# Altium PCB MB1814.PcbDoc (part 5 of 6)
Units mm, origin at the board's own origin, x right, y up, seen from the top; angles counter-clockwise.
Board outline 70 x 82.5 mm, 4 copper layers (Top Layer, Signal Layer 1, Signal Layer 2, Bottom Layer), stack 1.614 mm thick; 207 components, 155 nets, 901 pads, 710 vias.
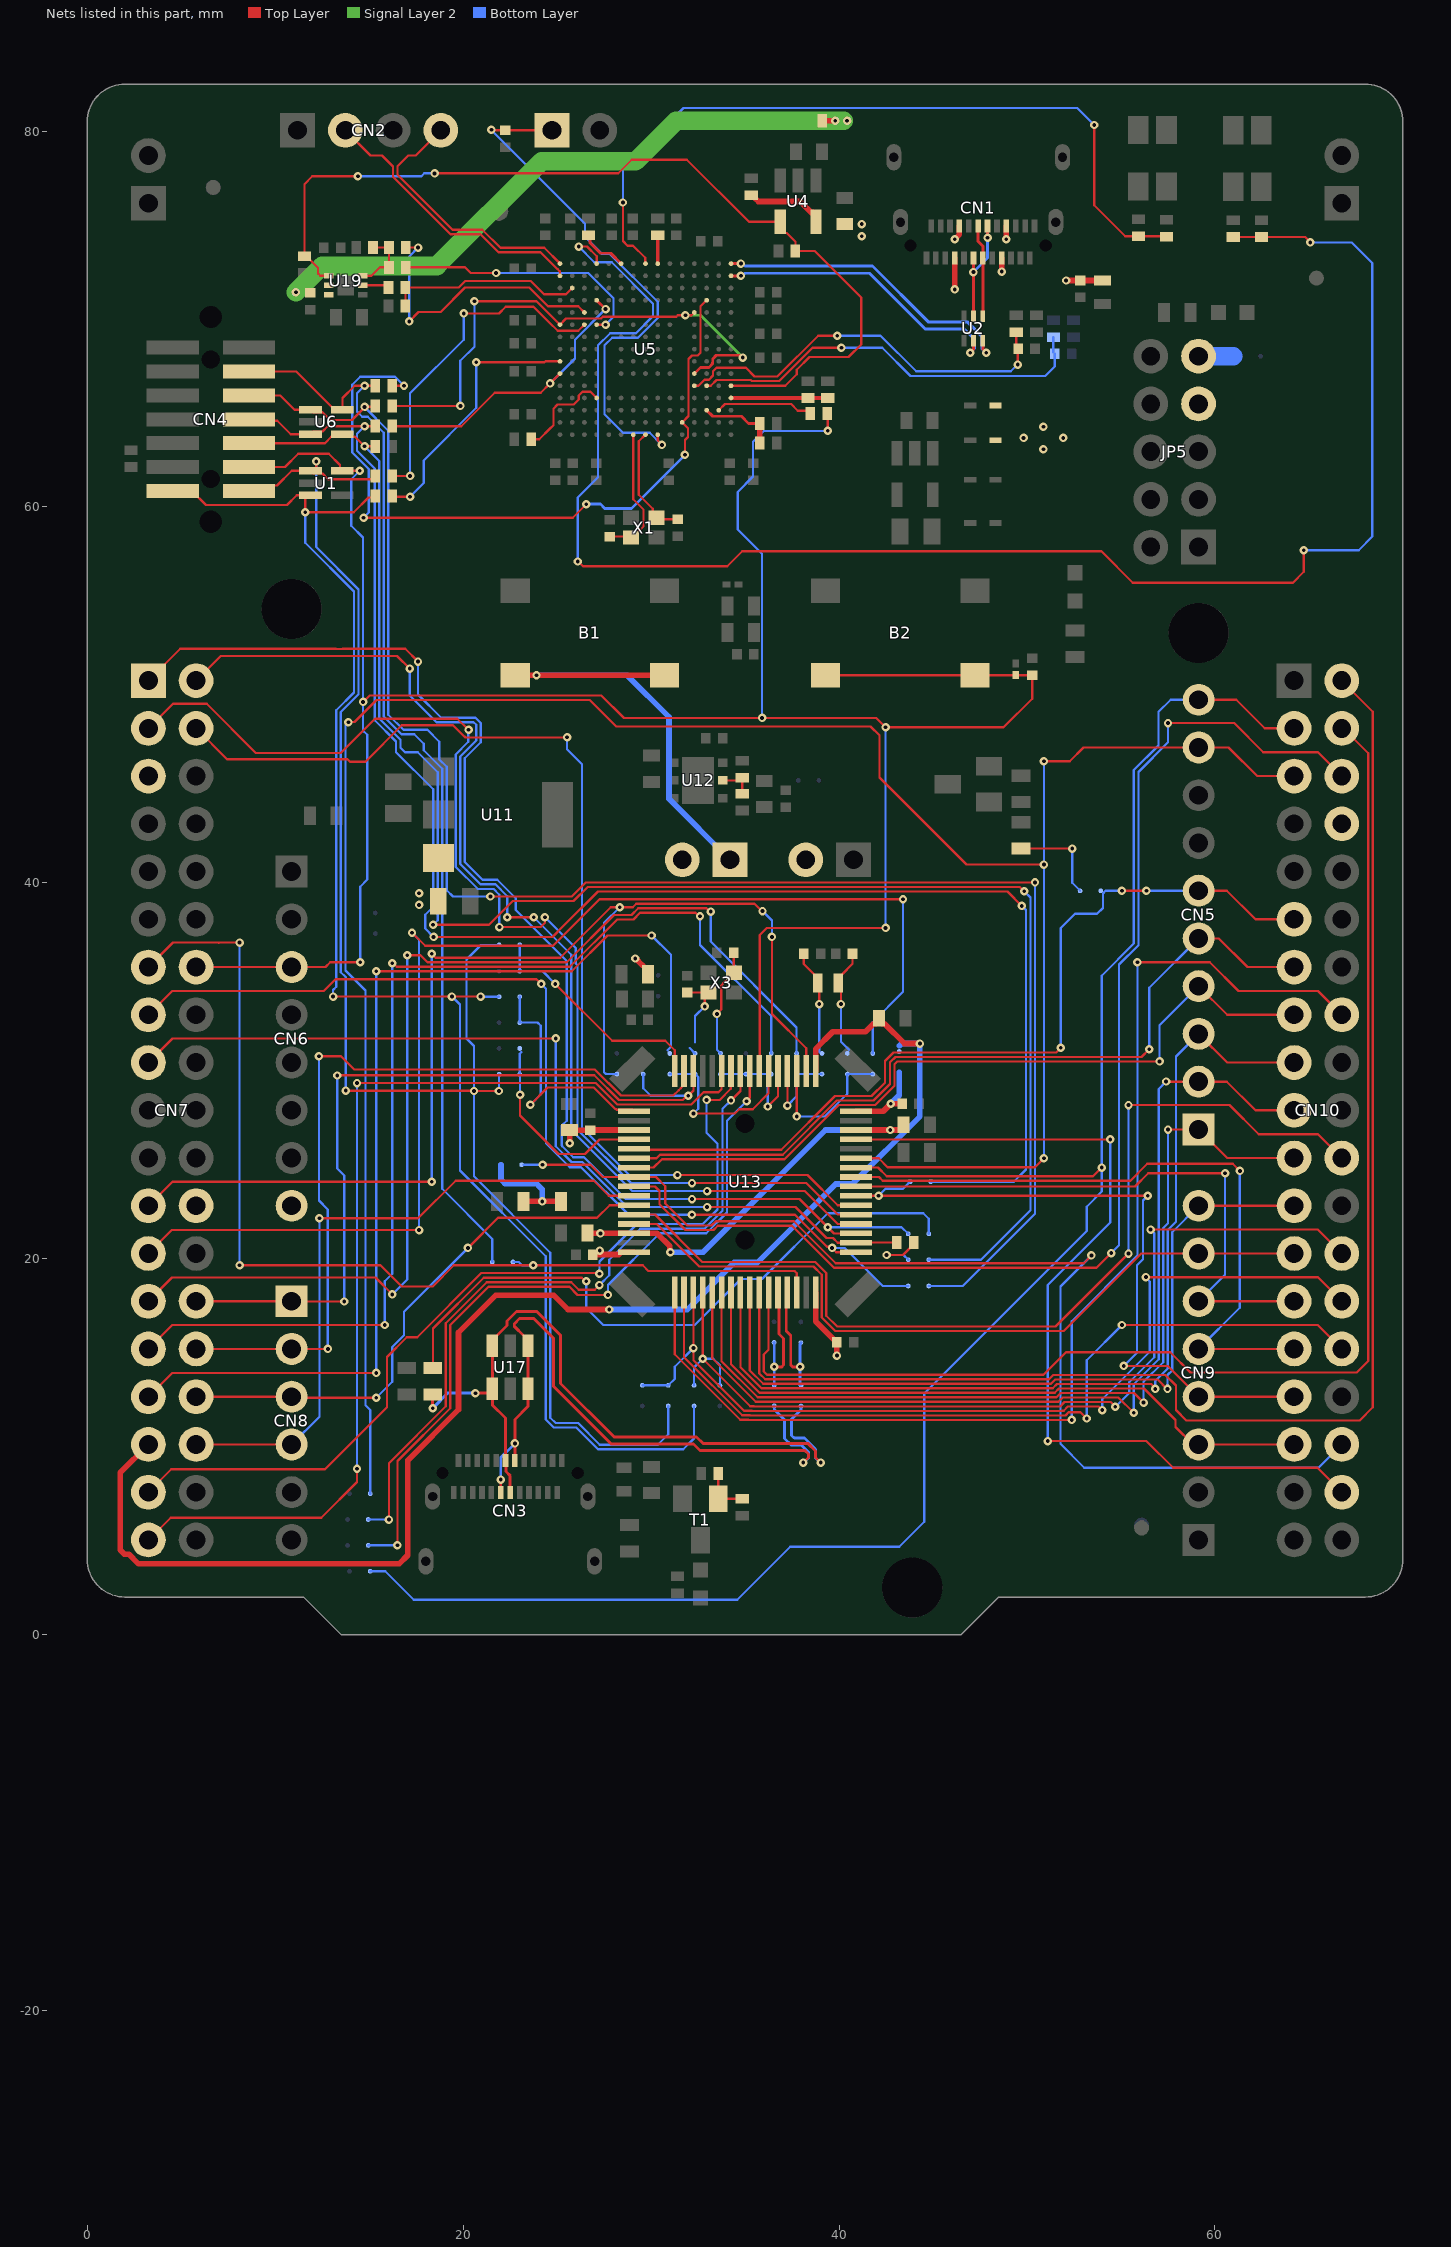
[diagram p5: the nets of this part, all layers, seen from the top]

## Via types
v1: diameter 0.45, hole 0.2, Top Layer to Bottom Layer, tented both sides, 696 vias
v2: diameter 0.45, hole 0.2, Top Layer to Bottom Layer, 14 vias

## Nets (pads, with @x,y where several pads share a name; then routed paths per layer and width w, separated by ;. In a path a pad name is that pad's centre, name@x,y a point inside that pad or via, vN(x,y) a via of type N, cw(c..) or ccw(c..) an arc to the next point about the centre after c; other vN are vias at no path point) (continued)
NetR4_1: R4.1 U5.F15 | length 2.5
  Top Layer w0.15: R4.1@26.675,74.45 26.744,74.381 26.744,74.058 27.302,73.5 27.85,73.5 U5.F15@28.4,72.95
NetR5_1: R5.1 U5.J15 | length 1.7
  Top Layer w0.2: R5.1@30.1,74.45 30.195,74.45 30.35,74.295 U5.J15@30.35,72.95
NetR10_1: R10.1 U5.D4 | length 5.3
  Top Layer w0.12: R10.1@23.625,63.6 24.05,63.6 24.625,64.175 24.8,64.35 24.8,65.231 25.024,65.455 25.886,65.455 26.145,65.714 26.145,65.926 26.344,66.125 26.775,66.125 U5.D4@27.1,65.8
NetR20_1: R20.1 R21.1 R22.1 U19.7 | length 3.5
  Top Layer w0.12: U19.7@14.65,72.3 15.125,72.3 15.575,72.75 R20.1@16.05,72.75 R21.1@16.05,73.8 R22.1@15.2,73.8
NetR29_1: R29.1 SB6.2 | length 5.2
  Top Layer w0.12: R29.1@49.675,41.825 v1(52.4,41.825)
  Bottom Layer w0.12: v1(52.4,41.825) 52.4,40 SB6.2@52.825,39.575
NetR32_1: R32.1 SB9.2 | length 3
  Top Layer w0.12: v1(42.525,20.2) 43.4,20.2 43.77,20.57 43.77,20.665 R32.1@43.965,20.86
  Bottom Layer w0.12: v1(42.525,20.2) 43.425,20.2 SB9.2@43.675,19.95
NetR39_2: R39.2 R41.2 T1.1 | length 2.5
  Top Layer w0.12: R41.2@33.575,8.575 T1.1@33.575,7.225 R39.2@34.775,7.225
NetR44_1: R44.1 U5.A10 U5.M6 U5.M11 | length 29.2
  Top Layer w0.12: R44.1@16.225,65.375 v1(19.85,65.375) ; v1(20.6,70.95) 23.9,70.95 U5.A10@25.15,69.7 25.475,70.025 27.327,70.025 27.422,70.12 31.333,70.12 31.413,70.2 v1(31.825,70.2) ; v1@31.789,70.204 32.154,70.204 U5.M11@32.3,70.35
  Top Layer w0.15: U5.M6@32.3,67.1 32.625,67.425 33.078,67.425 33.27,67.617 33.27,67.67 33.28,67.68 33.28,67.883 33.467,68.07 34.755,68.07 v1(34.875,67.95)
  Signal Layer 2 w0.15: v1(31.825,70.2) 32.625,70.2 v1(34.875,67.95)
  Bottom Layer w0.12: v1(19.85,65.375) 19.85,67.781 20.6,68.531 v1(20.6,70.95)
NetR45_1: R45.1 U5.L2 U5.N12 | length 39.1
  Top Layer w0.12: v1(14.7,59.425) 25.825,59.425 v1(26.55,60.15) ; R45.1@16.225,66.45 v1(16.85,66.45) ; v1(31.8,62.775) 31.8,63.569 31.955,63.724 31.955,64.195 U5.L2@31.65,64.5 31.994,64.844 31.994,67.875 32.174,68.055 32.48,68.055 32.625,68.2 32.625,70.675 U5.N12@32.95,71
  Bottom Layer w0.12: v1(14.7,59.425) 14.975,59.7 14.975,62.023 14.1,62.898 14.1,66.5 14.525,66.925 16.375,66.925 v1(16.85,66.45)
  Bottom Layer w0.15: v1(26.55,60.15) 27.305,60.15 27.53,59.925 28.95,59.925 v1(31.8,62.775)
NetR46_1: R46.1 U5.A6 U5.D12 | length 15.9
  Top Layer w0.12: R46.1@16.225,64.3 19.9,64.3 21.675,66.075 24.125,66.075 v1(24.625,66.575) U5.A6@25.15,67.1
  Top Layer w0.15: U5.D12@27.1,71 27.575,70.525 v1(27.576,70.528) v1(27.576,70.528)
  Bottom Layer w0.12: v1(24.625,66.575) 25.945,67.895 25.945,68.897 v1(27.576,70.528)
NetR50_1: R50.1 U5.P3 | length 5.2
  Top Layer w0.12: U5.P3@33.6,65.15 33.925,65.475 37.45,65.475 37.8,65.125 38.325,65.125 R50.1@38.475,64.975
NetR51_1: R51.1 U19.6 | length 1.4
  Top Layer w0.12: U19.6@14.65,71.8 15.9,71.8 R51.1@16.025,71.675
NetR52_1: R52.1 R53.2 U12.5 | length 1.9
  Top Layer w0.12: U12.5@33.8,45.45 34.675,45.45 R53.2@34.8,45.575 ; R53.2@34.85,45.6 34.85,44.775 R52.1@34.875,44.75
NetSB24_2: SB24.2 SB25.2 U13.6 | length 9.3
  Top Layer w0.12: v1(32.25,27.725) 34.45,27.725 34.685,27.96 35.41,27.96 36.25,28.8 U13.6@36.25,30
  Bottom Layer w0.12: SB24.2@30.99,29.825 SB25.2@32.34,29.825 32.5,29.665 32.5,27.975 v1(32.25,27.725)
NetSB26_2: SB26.2 SB27.2 SB28.2 U13.5 | length 6.6
  Top Layer w0.12: v1(36.2,28.1) 36.75,28.65 U13.5@36.75,30
  Bottom Layer w0.12: SB26.2@33.69,29.825 SB27.2@35.04,29.825 SB28.2@36.39,29.825 36.2,29.635 v1(36.2,28.1)
NetSB29_2: SB29.2 SB30.2 U13.4 | length 5.1
  Top Layer w0.12: v1(37.25,28.15) U13.4@37.25,30
  Bottom Layer w0.12: v1(37.25,28.15) 37.74,28.64 SB29.2@37.74,29.825 SB30.2@39.09,29.825
NetSB31_2: SB31.2 SB32.2 U13.3 | length 8
  Top Layer w0.12: v1(37.75,27.575) U13.3@37.75,30
  Bottom Layer w0.12: v1(37.75,27.575) 39.237,27.575 40.44,28.777 SB31.2@40.44,29.825 SB32.2@41.79,29.825
OSC32_IN: C57.2 SB31.1 X2.2 | length 5.7
  Top Layer w0.12: v1(40.1,33.55) 40.1,34.54 X2.2@39.965,34.675 40.155,34.865 40.155,35.13 40.715,35.69 C57.2@40.715,36.225 C57.2@40.665,36.175
  Bottom Layer w0.12: v1(40.1,33.55) 40.1,31.55 40.525,31.125
OSC32_OUT: C58.2 SB30.1 X2.1 | length 5.6
  Top Layer w0.12: C58.2@38.115,36.225 38.115,35.685 38.675,35.125 38.675,34.865 X2.1@38.865,34.675 38.95,34.59 v1(38.95,33.55)
  Bottom Layer w0.12: 38.95,31 v1(38.95,33.55)
OSC_IN: C56.2 SB26.1 X3.1 | length 5.8
  Top Layer w0.12: v1(33.5,33.025) 33.5,33.035 33.725,33.26 33.725,34.545 33.9,34.72 33.905,34.72 34.035,34.85 34.035,34.9 34.35,35.215 X3.1@34.4,35.215 C56.2@34.4,36.29
  Bottom Layer w0.12: v1(33.5,33.025) 33.5,31.115 SB26.1@33.69,30.925
OSC_OUT: C59.2 SB25.1 X3.3 | length 4.5
  Top Layer w0.12: C59.2@31.925,34.165 X3.3@33.05,34.165 32.85,33.965 v1(32.85,33.425)
  Bottom Layer w0.12: 32.055,31.21 SB25.1@32.34,30.925 ; 32.34,31.5 32.34,32.915 v1(32.85,33.425)
PA0: CN7.28 CN8.1 SB21.2 U13.14 | length 44.1
  Top Layer w0.12: CN7.28@5.79,17.74 CN8.1@10.87,17.74 10.885,17.725 v1(13.675,17.725) ; v1(13.3,29.75) 13.31,29.76 26.978,29.76 28.296,28.443 31.682,28.443 31.915,28.675 v1(31.975,28.675) 32.25,28.95 U13.14@32.25,30
  Bottom Layer w0.12: v1(13.3,29.75) 13.3,24.8 13.675,24.425 13.675,22.555 v1(13.675,17.725) ; SB21.2@29.575,29.825 29.575,29.075 29.975,28.675 v1(31.975,28.675)
PA1: CN7.30 CN8.2 U13.15 | length 44.1
  Top Layer w0.12: CN7.30@5.79,15.2 CN8.2@10.87,15.2 v1(12.8,15.2) ; v1(12.325,30.775) 13.5,30.775 14.2,30.075 27.003,30.075 28.395,28.683 31.183,28.683 31.47,28.97 31.475,28.97 31.58,29.075 31.58,29.08 31.66,29.16 31.66,29.91 U13.15@31.75,30
  Bottom Layer w0.12: v1(12.325,30.775) 12.325,23.1 12.8,22.625 v1(12.8,15.2)
PA2: SB1.1 SB7.1 U13.16 | length 12.5
  Top Layer w0.12: v1(24.9,34.625) 27.925,31.6 30.75,31.6 31.25,31.1 U13.16@31.25,30
  Bottom Layer w0.12: SB7.1@23.01,35.306 24.219,35.306 v1(24.9,34.625) ; SB1.1@23.01,36.703 23.01,35.34 SB7.1@23.025,35.325
PA3: SB2.1 SB18.1 U13.17 | length 13.4
  Top Layer w0.12: v1(23.575,28.2) 24.485,29.11 26.949,29.11 28.097,27.963 28.137,27.963 28.168,27.932 29.018,27.932 U13.17@29.1,27.85
  Bottom Layer w0.12: SB2.1@23.01,33.94 SB18.1@23.01,32.565 23.02,32.575 23.95,32.575 24.125,32.4 24.125,28.75 v1(23.575,28.2)
PA4: SB3.1 SB22.1 U13.20 | length 10.7
  Top Layer w0.12: v1(23.025,28.725) 23.025,27.625 25.075,25.575 26.475,25.575 27.25,26.35 U13.20@29.1,26.35
  Bottom Layer w0.12: v1(23.025,28.725) 23.025,29.8 SB3.1@23.01,29.815 23.01,30.91 23.1,31
PA5: CN5.6 CN10.11 SB6.1 U13.21 | length 46.3
  Top Layer w0.12: U13.21@29.1,25.85 29.15,25.8 36.917,25.8 39.777,28.66 41.731,28.66 42.44,29.369 42.44,30.519 42.901,30.98 51.555,30.98 v1(51.8,31.225) ; v1(55.05,39.575) 55.054,39.579 v1(56.354,39.579) ; CN5.6@59.13,39.584 60.627,39.584 62.151,38.06 CN10.11@64.21,38.06
  Bottom Layer w0.12: v1(51.8,31.225) 51.8,37.6 52.55,38.35 52.65,38.35 53.725,38.35 54.036,38.661 54.036,39.438 54.173,39.575 v1(55.05,39.575) ; v1@56.359,39.584 CN5.6@59.13,39.584
PA6: CN5.5 CN10.13 U13.22 | length 43.2
  Top Layer w0.12: U13.22@29.1,25.35 30.286,25.35 30.476,25.54 36.996,25.54 39.876,28.42 41.831,28.42 42.71,29.299 42.71,30.449 43.001,30.74 56.09,30.74 v1(56.5,31.15) ; CN5.5@59.13,37.044 60.206,37.044 61.73,35.52 CN10.13@64.21,35.52
  Bottom Layer w0.12: v1(56.5,31.15) 56.5,34.414 CN5.5@59.13,37.044
PA7: CN5.4 CN10.15 U13.23 | length 41.5
  Top Layer w0.12: U13.23@29.1,24.85 30.125,24.85 30.575,25.3 37.095,25.3 39.975,28.18 41.93,28.18 42.95,29.2 42.95,30.35 43.1,30.5 v1(57.05,30.5) ; CN5.4@59.13,34.504 60.654,32.98 CN10.15@64.21,32.98
  Bottom Layer w0.12: v1(57.05,30.5) 57.05,32.424 CN5.4@59.13,34.504
PA8: CN9.8 CN10.23 U13.41 | length 42.5
  Top Layer w0.12: U13.41@35.25,18.2 35.25,14.061 35.966,13.345 51.27,13.345 51.5,13.575 56.95,13.575 57.45,13.075 v1(57.475,13.075) ; CN9.8@59.13,22.82 CN10.23@64.21,22.82
  Bottom Layer w0.12: v1(57.475,13.075) 57.475,13.811 57.725,14.061 57.725,21.415 CN9.8@59.13,22.82
PA9: CN10.2 U13.42 | length 78.5
  Top Layer w0.12: U13.42@35.75,18.2 35.75,13.9 36.065,13.585 51.171,13.585 51.401,13.815 57.36,13.815 57.925,13.25 57.925,11.95 58.475,11.4 ; 58.5,11.4 67.7,11.4 68.4,12.1 68.4,49.11 CN10.2@66.75,50.76
PA10: CN10.4 U13.43 | length 72
  Top Layer w0.12: U13.43@36.25,18.2 36.25,15.16 35.99,14.9 35.99,13.999 36.164,13.825 50.875,13.825 52.075,15.025 57.625,15.025 58.7,13.95 67.55,13.95 68.16,14.56 68.16,46.89 66.83,48.22 CN10.4@66.75,48.22
PA11: SB13.2 SB44.2 U13.44 | length 6.8
  Top Layer w0.155: v1(36.55,14.255) 36.555,14.25 36.956,14.25 37.047,14.341 37.047,15.755 36.81,15.993 36.81,18.14 U13.44@36.75,18.2
  Bottom Layer w0.155: SB44.2@36.541,15.55 36.55,15.541 36.55,14.25 SB13.2@36.55,13.275
PA12: SB12.2 SB17.2 U13.45 | length 6.8
  Top Layer w0.155: U13.45@37.25,18.2 37.191,18.14 37.191,16.151 37.428,15.913 37.428,14.341 37.519,14.25 37.92,14.25 v1(37.925,14.255)
  Bottom Layer w0.155: SB17.2@37.944,13.294 37.925,13.275 37.925,14.25 37.925,15.424 37.948,15.447 37.948,15.517 SB12.2@37.967,15.536
PA13: CN7.13 SB40.2 U13.46 | length 56.6
  Top Layer w0.12: CN7.13@3.25,35.52 4.555,36.825 v1(8.1,36.825) 7,36.825 6.975,36.8 ; v1(8.1,19.65) 15.6,19.65 16.725,18.525 18.375,18.525 19.5,19.65 v1(23.725,19.65) 29.55,19.65 29.85,19.35 37.625,19.35 37.75,19.225 U13.46@37.75,18.2
  Bottom Layer w0.12: v1(8.1,19.65) v1(8.1,36.825) ; SB40.2@22.65,19.825 22.95,19.825 23.125,19.65 v1(23.725,19.65)
PA14: CN7.15 SB41.2 U13.49 | length 54.2
  Top Layer w0.12: CN7.15@3.25,32.98 4.52,34.25 12.575,34.25 13.2,34.875 13.7,34.875 23.9,34.875 v1(24.15,34.625) ; v1(32.17,22.345) 37.655,22.345 39.362,20.638 39.562,20.638 v1(39.625,20.575) 39.85,20.35 U13.49@40.9,20.35
  Bottom Layer w0.12: v1@24.125,34.65 24.409,34.366 24.409,26.141 25.675,24.875 26.271,24.875 28.796,22.35 29.5,22.35 ; 29.5,22.345 v1(32.17,22.345) ; v1(39.625,20.575) 40.3,20.575 42.325,18.55 SB41.2@43.675,18.55
PA15: CN7.17 R32.2 U13.50 | length 48.2
  Top Layer w0.12: CN7.17@3.25,30.44 4.535,31.725 v1(24.925,31.725) ; v1(32.975,22.75) 37.675,22.75 39.325,21.1 39.675,21.1 39.925,20.85 U13.50@40.9,20.85 40.91,20.86 R32.2@43.065,20.86
  Bottom Layer w0.12: v1(24.925,31.725) 24.925,25.988 25.763,25.15 26.336,25.15 28.736,22.75 v1(32.975,22.75)
PB0: CN7.34 CN8.4 U13.26 | length 35.6
  Top Layer w0.12: CN7.34@5.79,10.12 CN8.4@10.87,10.12 ; v1(12.35,22.15) 17.6,22.15 19.6,24.15 26.95,24.15 27.75,23.35 U13.26@29.1,23.35
  Bottom Layer w0.12: CN8.4@10.87,10.12 12.35,11.6 v1(12.35,22.15)
PB1: CN7.32 CN8.3 U13.27 | length 29.3
  Top Layer w0.12: CN7.32@5.79,12.66 CN8.3@10.87,12.66 10.89,12.66 CN8.3@10.9,12.65 ; CN8.3@11.025,12.6 v1(15.375,12.6) ; v1(20.25,20.575) 21.85,22.175 27.125,22.175 27.8,22.85 U13.27@29.1,22.85
  Bottom Layer w0.12: v1(15.375,12.6) 16.225,13.45 16.225,15.3 16.85,15.925 16.85,17.175 v1(20.25,20.575)
PB2: CN10.22 U13.28 | length 52.1
  Top Layer w0.12: U13.28@29.1,22.35 30.2,22.35 32.72,19.83 38.734,19.83 39.32,19.244 39.32,16.969 39.899,16.39 51.515,16.39 v1(55.4,20.275) ; v1(55.4,28.175) 60.775,28.175 62.325,26.625 65.485,26.625 CN10.22@66.75,25.36
  Bottom Layer w0.12: v1(55.4,20.275) v1(55.4,28.175)
PB3: CN9.4 CN10.31 SB15.1 U13.55 | length 36.8
  Top Layer w0.12: U13.55@40.9,23.35 v1(42.1,23.35) v1(56.425,23.35) ; v1(55.15,14.3) 57.49,14.3 CN9.4@59.13,12.66 CN10.31@64.21,12.66
  Bottom Layer w0.12: v1(42.1,23.35) 42.475,23.725 43.4,23.725 SB15.1@43.775,24.1 ; v1(55.15,14.3) 55.85,15 55.85,19.65 56.17,19.97 56.17,23.095 v1(56.425,23.35)
PB4: CN9.6 CN10.27 U13.56 | length 32.4
  Top Layer w0.12: U13.56@40.9,23.85 55.75,23.85 56.445,24.545 v1(60.535,24.545) ; CN9.6@59.13,17.74 CN10.27@64.21,17.74
  Bottom Layer w0.12: CN9.6@59.13,17.74 60.535,19.145 v1(60.535,24.545)
PB5: CN9.5 CN10.29 U13.57 | length 36.5
  Top Layer w0.12: U13.57@40.9,24.35 42.125,24.35 42.325,24.15 55.5,24.15 56.4,25.05 60.95,25.05 v1(61.325,24.675) ; CN9.5@59.13,15.2 CN10.29@64.21,15.2
  Bottom Layer w0.12: CN9.5@59.13,15.2 61.325,17.395 v1(61.325,24.675)
PB6: CN5.10 CN10.3 SB37.2 U13.58 | length 101.7
  Top Layer w0.12: U13.58@40.9,24.85 42.075,24.85 42.535,24.39 53.515,24.39 v1(53.975,24.85) ; CN5.10@59.13,49.744 61.131,49.744 62.655,48.22 CN10.3@64.21,48.22
  Bottom Layer w0.12: SB37.2@15.05,3.375 15.85,3.375 17.375,1.85 34.575,1.85 37.395,4.67 43.195,4.67 44.535,6.01 44.535,12.824 44.55,12.839 44.55,12.85 53.175,21.475 53.175,22.772 53.975,23.572 v1(53.975,24.85) 53.975,35.064 55.685,36.774 55.685,45.999 57,47.314 57,49.1 57.644,49.744 CN5.10@59.13,49.744
PB7: CN5.9 CN10.5 SB34.2 U13.59 | length 129.9
  Top Layer w0.12: v1(13.895,48.55) 13.91,48.565 14.212,48.565 15.382,49.735 26.74,49.735 28.15,48.325 41.675,48.325 42.15,47.85 42.15,45.6 46.775,40.975 v1(50.9,40.975) ; U13.59@40.9,25.35 42.104,25.35 42.579,24.875 50.425,24.875 v1(50.9,25.35) ; v1(50.9,46.475) 52.275,46.475 53.004,47.204 CN5.9@59.13,47.204 60.721,47.204 62.245,45.68 CN10.5@64.21,45.68
  Bottom Layer w0.12: v1(13.895,48.55) 13.736,48.391 13.736,35.339 14.8,34.275 14.8,12.2 15.05,11.95 SB34.2@15.05,7.5 ; v1(50.9,25.35) v1(50.9,40.975) v1(50.9,46.475)
PB8: CN10.36 U13.61 | length 47.7
  Top Layer w0.12: U13.61@40.9,26.35 v1(54.425,26.35) ; v1(51.1,10.3) 56.35,10.3 57.775,8.875 65.455,8.875 CN10.36@66.75,7.58
  Bottom Layer w0.12: v1(51.1,10.3) 51.1,18.6 54.425,21.925 v1(54.425,26.35)
PB10: CN9.7 CN10.25 U13.29 | length 40.5
  Top Layer w0.12: U13.29@29.1,21.85 30.3,21.85 32.56,19.59 38.635,19.59 39.08,19.145 39.08,16.87 39.8,16.15 51.95,16.15 56.08,20.28 CN9.7@59.13,20.28 CN10.25@64.21,20.28
PB12: CN10.16 U13.33 | length 63.7
  Top Layer w0.12: U13.33@31.25,18.2 31.25,14.925 34.745,11.43 35.165,11.43 35.17,11.425 v1(52.375,11.425) ; v1(55.875,35.775) 59.725,35.775 61.25,34.25 65.48,34.25 CN10.16@66.75,32.98
  Bottom Layer w0.12: v1(52.375,11.425) 52.375,16.675 55.875,20.175 v1(55.875,35.775)
PB13: CN10.30 U13.34 | length 44.3
  Top Layer w0.12: U13.34@31.75,18.2 31.75,14.764 34.844,11.67 35.265,11.67 35.27,11.665 52.042,11.665 52.207,11.83 52.845,11.83 v1(53.175,11.5) ; v1(55.05,16.475) 65.475,16.475 CN10.30@66.75,15.2
  Bottom Layer w0.12: v1(53.175,11.5) 53.175,14.6 v1(55.05,16.475)
PB14: CN10.28 SB19.2 SB20.2 U13.35 | length 49.7
  Top Layer w0.12: U13.35@32.25,18.2 v1(32.25,15.25) 32.25,14.604 34.944,11.91 35.364,11.91 35.369,11.905 51.866,11.905 51.871,11.91 51.948,11.91 52.173,12.135 53.815,12.135 v1(54,11.95) ; v1(56.325,19.025) 56.325,19.02 56.335,19.01 65.48,19.01 CN10.28@66.75,17.74
  Bottom Layer w0.12: SB19.2@29.535,13.265 SB20.2@30.91,13.265 31.25,13.605 31.25,14.25 v1(32.25,15.25) ; v1(54,11.95) 54,12.525 56.525,15.05 56.525,18.79 56.325,18.99 v1(56.325,19.025)
PB15: CN10.26 SB23.2 SB33.2 U13.36 | length 51.6
  Top Layer w0.12: v1@32.75,14.675 U13.36@32.75,18.2 ; v1(32.751,14.676) v1(32.751,14.676) 35.275,12.15 35.464,12.15 35.469,12.145 51.767,12.145 51.997,12.375 54.45,12.375 v1(54.7,12.125) ; v1(56.575,21.55) 56.575,21.539 56.664,21.45 56.764,21.55 65.48,21.55 CN10.26@66.75,20.28
  Bottom Layer w0.12: SB23.2@32.285,13.265 32.285,14.21 v1(32.751,14.676) ; v1@32.75,14.675 33.3,14.675 33.66,14.315 SB33.2@33.66,13.265 ; v1(54.7,12.125) 54.705,12.125 55.435,12.855 55.435,13.424 56.765,14.754 56.765,21.36 v1(56.575,21.55)
PC0: SB36.1 U13.8 | length 40.3
  Top Layer w0.12: v1(16.5,4.75) 16.5,9.236 19.315,12.051 19.315,16.476 21.349,18.51 25.651,18.51 26.086,18.075 v1(27.7,18.075) ; v1(35.075,28.375) 35.25,28.55 U13.8@35.25,30
  Bottom Layer w0.12: SB36.1@14.95,4.75 v1(16.5,4.75) ; v1@27.7,18.175 27.7,18.6 30.46,21.36 32.939,21.36 34.04,22.461 34.04,27.34 v1(35.075,28.375)
PC1: SB35.1 U13.9 | length 38.6
  Top Layer w0.12: v1(16.05,6.125) 16.05,9.125 19.075,12.15 19.075,16.575 21.25,18.75 25.75,18.75 26.15,18.35 27,18.35 v1(27.25,18.6) ; v1(34.25,28.425) 34.75,28.925 U13.9@34.75,30
  Bottom Layer w0.12: SB35.1@14.95,6.125 v1(16.05,6.125) ; v1@27.275,18.625 27.775,19.125 27.775,19.95 29.425,21.6 32.839,21.6 33.8,22.561 33.8,27.975 v1(34.25,28.425)
PC2: CN7.35 U13.10 | length 47
  Top Layer w0.12: CN7.35@3.25,7.58 4.47,8.8 12.65,8.8 15.95,12.1 15.95,14.775 17,15.825 17.55,15.825 20.965,19.24 27.21,19.24 v1(27.25,19.2) ; v1(32.95,28.45) 33.65,28.45 34.24,29.04 34.24,29.99 U13.10@34.25,30
  Bottom Layer w0.12: v1(27.25,19.2) 27.25,19.85 29.25,21.85 32.75,21.85 33.525,22.625 33.525,26.125 32.95,26.7 v1(32.95,28.45)
PC3: CN7.37 U13.11 | length 54.8
  Top Layer w0.12: CN7.37@3.25,5.04 4.435,6.225 12.45,6.225 14.35,8.125 v1(14.35,8.825) ; v1(14.35,29.35) 27.049,29.35 28.196,28.203 32.128,28.203 32.78,28.855 33.58,28.855 33.75,29.025 U13.11@33.75,30
  Bottom Layer w0.12: v1(14.35,8.825) v1(14.35,29.35)
PC4: CN10.34 SB42.2 U13.24 | length 60
  Top Layer w0.12: v1(24.225,25) 26.775,25 27.425,24.35 U13.24@29.1,24.35 30.254,24.35 30.75,23.854 30.75,22.939 31.689,22 31.924,21.765 33.216,21.765 33.451,22 37.589,22 39.824,19.765 53.015,19.765 v1(53.425,20.175)
  Bottom Layer w0.12: SB42.2@23.225,25 v1(24.225,25) ; v1(53.425,20.175) 51.775,18.525 51.775,10.15 53.05,8.875 65.505,8.875 CN10.34@66.75,10.12
PC5: CN10.6 U13.25 | length 68
  Top Layer w0.12: U13.25@29.1,23.85 30.2,23.85 30.45,23.6 30.45,22.9 31.825,21.525 33.315,21.525 33.55,21.76 37.49,21.76 39.725,19.525 53.7,19.525 v1(54.475,20.3) ; v1(57.5,48.5) 61.025,48.5 62.575,46.95 65.48,46.95 CN10.6@66.75,45.68
  Bottom Layer w0.12: v1(54.475,20.3) 54.9,20.725 54.9,35.65 55.925,36.675 55.925,45.9 57.5,47.475 v1(57.5,48.5)
PC6: CN5.2 CN10.19 U13.37 | length 53.1
  Top Layer w0.12: U13.37@33.25,18.2 33.25,14.703 35.568,12.385 51.668,12.385 51.898,12.615 54.86,12.615 v1(55.675,11.8) ; v1(57.397,29.431) 57.403,29.424 CN5.2@59.13,29.424 60.627,29.424 62.151,27.9 CN10.19@64.21,27.9
  Bottom Layer w0.12: v1(55.675,11.8) 55.675,13.325 57.005,14.655 57.005,29.03 v1@57.4,29.425
PC7: CN5.1 CN10.21 U13.38 | length 49.6
  Top Layer w0.12: U13.38@33.75,18.2 33.75,14.542 35.667,12.625 51.568,12.625 51.798,12.855 55.695,12.855 v1(56.2,12.35) ; v1(57.5,26.875) 59.121,26.875 CN5.1@59.13,26.884 60.654,25.36 CN10.21@64.21,25.36
  Bottom Layer w0.12: v1(56.2,12.35) 56.2,13.45 57.245,14.495 57.245,21.634 57.5,21.889 v1(57.5,26.875)
PC8: CN9.3 CN10.33 U13.39 | length 35.9
  Top Layer w0.12: U13.39@34.25,18.2 34.25,14.382 35.767,12.865 51.469,12.865 51.699,13.095 56.23,13.095 57.9,11.425 57.9,11.05 58.8,10.15 CN9.3@59.1,10.15 ; CN9.3@59.13,10.12 CN10.33@64.21,10.12
PC9: CN5.3 CN10.17 U13.40 | length 52.3
  Top Layer w0.12: U13.40@34.75,18.2 34.75,14.221 35.866,13.105 51.369,13.105 51.599,13.335 56.612,13.335 56.825,13.122 v1(56.825,13.075) ; CN5.3@59.13,31.964 60.654,30.44 CN10.17@64.21,30.44
  Bottom Layer w0.12: v1(56.825,13.075) 56.825,13.5 57.485,14.16 57.485,21.535 57.925,21.975 57.925,30.759 CN5.3@59.13,31.964
PC10: CN7.1 SB43.2 U13.51 | length 68.7
  Top Layer w0.12: CN7.1@3.25,50.76 4.94,52.45 13.227,52.45 13.232,52.445 13.568,52.445 13.573,52.45 16.921,52.45 v1(17.596,51.775) ; v1(32.175,23.175) 37.9,23.175 39.725,21.35 U13.51@40.9,21.35
  Bottom Layer w0.12: v1(17.596,51.775) 17.596,50.025 18.833,48.787 20.649,48.787 20.93,48.507 20.93,47.478 20.08,46.628 20.08,41.104 21.024,40.16 21.817,40.16 22.8,39.177 22.8,38.55 25.51,35.84 25.51,27.349 25.25,27.089 25.25,26.025 25.27,26.005 25.27,25.982 25.851,25.401 26.424,25.401 28.65,23.175 v1(32.175,23.175) ; v1(39.4,21.675) 43.325,21.675 SB43.2@43.675,21.325
PC11: CN7.2 U13.52 | length 60.7
  Top Layer w0.12: CN7.2@5.79,50.76 7.1,52.07 16.48,52.07 v1(17.15,51.4) ; v1(22.35,38.175) v1(23.75,38.175) ; v1(32.975,23.6) 38.175,23.6 39.925,21.85 U13.52@40.9,21.85
  Bottom Layer w0.12: v1(17.15,51.4) 17.15,49.975 18.578,48.547 20.55,48.547 20.69,48.407 20.69,47.578 19.84,46.728 19.84,41.005 20.925,39.92 21.717,39.92 22.35,39.287 v1(22.35,38.175) ; v1(23.75,38.175) 25.75,36.175 25.75,26.85 29,23.6 v1(32.975,23.6)
PC12: CN7.3 U13.53 | length 63.3
  Top Layer w0.12: CN7.3@3.25,48.22 4.555,49.525 6.35,49.525 8.965,46.91 13.485,46.91 15.312,48.737 19.69,48.737 v1(20.285,48.142) ; v1@21.95,37.65 24.125,37.65 24.35,37.875 v1(24.35,38.175) ; v1(32.175,24.025) 38.25,24.025 39.925,22.35 U13.53@40.9,22.35
  Bottom Layer w0.12: v1(20.285,48.142) 20.275,48.15 20.275,47.502 19.6,46.827 19.6,40.85 20.77,39.68 21.618,39.68 21.925,39.373 v1@21.925,37.725 ; v1(24.35,38.175) 25.99,36.535 25.99,35.71 26.08,35.62 26.08,26.87 28.925,24.025 v1(32.175,24.025)
  other v1: 21.925,37.65
PC13: CN7.23 SB16.2 U13.2 | length 66.1
  Top Layer w0.12: CN7.23@3.25,22.82 4.53,24.1 v1(18.325,24.1) ; v1(18.325,36.225) 18.53,36.02 25.17,36.02 27.85,38.7 v1@28.375,38.7 ; v1(28.325,38.7) 29.025,38.7 29.21,38.885 35.505,38.885 35.89,38.5 v1(35.925,38.5) ; v1(36.425,37.125) 36.425,33.025 38.25,31.2 U13.2@38.25,30
  Bottom Layer w0.12: v1(18.325,24.1) v1(18.325,36.225) ; SB16.2@28.175,29.825 27.595,29.825 27.495,29.925 27.495,37.87 v1(28.325,38.7) ; v1(35.925,38.5) 36.425,38 v1(36.425,37.125)
PC14: CN7.25 SB32.1 | length 67.2
  Top Layer w0.12: CN7.25@3.25,20.28 4.495,21.525 v1(17.65,21.525) ; v1(17.275,37.35) 17.975,36.65 24.775,36.65 27.25,39.125 v1(43.4,39.125)
  Bottom Layer w0.12: v1(17.275,37.35) 17.65,36.975 v1(17.65,21.525) ; SB32.1@41.79,30.925 41.79,32.59 43.4,34.2 v1(43.4,39.125)
PC15: CN7.27 SB29.1 | length 59.2
  Top Layer w0.12: CN7.27@3.25,17.74 4.51,19 15.33,19 v1@16.225,18.105 ; v1(17.025,36.15) 17.725,36.15 18.095,35.78 25.505,35.78 28.02,38.295 28.959,38.295 29.309,38.645 32.94,38.645 33.11,38.475 v1(33.175,38.475)
  Bottom Layer w0.12: v1(16.23,18.1) 17.025,18.895 v1(17.025,36.15) ; v1(33.175,38.475) 33.175,36.875 37.74,32.31 SB29.1@37.74,30.925
PD2: CN7.4 U13.54 | length 58.9
  Top Layer w0.12: CN7.4@5.79,48.22 7.435,46.575 13.85,46.575 13.975,46.45 14.8,46.45 16.732,48.382 19.463,48.382 20.071,47.775 20.08,47.775 20.117,47.737 25.512,47.737 v1(25.525,47.75) ; v1(31.4,24.45) 38.325,24.45 39.925,22.85 U13.54@40.9,22.85
  Bottom Layer w0.12: v1(25.525,47.75) 25.525,47.106 26.32,46.311 26.32,26.969 28.839,24.45 v1(31.4,24.45)
PF0: CN7.29 SB28.1 | length 59.1
  Top Layer w0.12: CN7.29@3.25,15.2 4.525,16.475 v1(15.825,16.475) ; v1(16.225,35.725) 16.275,35.725 16.46,35.54 25.676,35.54 28.191,38.055 29.059,38.055 29.409,38.405 32.365,38.405 32.545,38.225 v1(32.6,38.225)
  Bottom Layer w0.12: v1(15.825,16.475) 15.825,18.8 16.225,19.2 v1(16.225,35.725) ; v1(32.6,38.225) 32.6,36.7 36.39,32.91 SB28.1@36.39,30.925
PF1: CN7.31 SB24.1 | length 56.1
  Top Layer w0.12: CN7.31@3.25,12.66 4.515,13.925 v1(15.375,13.925) ; v1(15.375,35.3) 25.775,35.3 27.675,37.2 v1(30.025,37.2)
  Bottom Layer w0.12: v1(15.375,35.3) 15.375,13.93 v1@15.38,13.925 ; v1(30.025,37.2) 31.055,36.17 31.055,31.28 30.875,31.1
STLK_LED: R2.1 R3.2 U5.D15 | length 90.8
  Top Layer w0.12: v1(26.1,57.1) 26.115,57.1 26.375,56.84 34.051,56.84 34.851,57.64 53.96,57.64 55.625,55.975 64.15,55.975 64.725,56.55 v1(64.725,57.7) v1@64.665,57.64 ; v1(26.151,73.854) 26.588,73.854 27.105,73.337 27.105,72.955 U5.D15@27.1,72.95 ; R2.1@60.97,74.365 R3.2@62.47,74.365 64.81,74.365 v1@65.075,74.1 ; v1(65.075,74.075) v1@65.075,74.1 ; v1@65.1,74.1 65.075,74.125 v1@65.075,74.1
  Top Layer w0.3: v1@65.075,74.1 v1@65.1,74.1
  Bottom Layer w0.12: v1(26.1,57.1) 26.1,60.5 27.175,61.575 27.175,68.6 27.825,69.25 29.2,69.25 30.105,70.155 30.105,70.82 27.898,73.027 26.977,73.027 v1(26.151,73.854) ; v1(64.725,57.7) 67.65,57.7 68.375,58.425 68.375,72.975 67.275,74.075 v1(65.075,74.075)
STLK_NRST: C1.2 JP1.1 U5.J1 | length 28.6
  Top Layer w0.12: v1(21.5,80.075) 21.525,80.05 C1.2@22.25,80.05 ; C1.2@22.285,80.04 JP1.1@24.73,80.04 ; U5.J1@30.35,63.85 30.35,63.535 30.575,63.31 v1(30.575,63.3)
  Bottom Layer w0.12: v1(21.5,80.075) 21.5,80.05 26.48,75.07 26.48,74.372 27.257,73.595 27.377,73.475 27.789,73.475 30.345,70.919 30.345,70.056 29.299,69.01 27.924,69.01 27.52,68.606 27.52,66.932 27.523,66.929 27.523,64.932 28.505,63.95 29.925,63.95 v1(30.575,63.3)
STLK_OSC_IN: C33.2 U5.G1 X1.1 | length 7.2
  Top Layer w0.12: C33.2@27.8,58.425 28.875,58.425 X1.1@28.925,58.375 29.24,58.69 29.315,58.69 29.6,58.975 29.6,59.856 29.05,60.406 U5.G1@29.05,63.85
STLK_OSC_OUT: C32.2 U5.H1 X1.3 | length 5.8
  Top Layer w0.12: U5.H1@29.7,63.85 29.345,63.495 29.345,60.655 30.09,59.91 30.09,59.61 X1.3@30.275,59.425 ; X1.3@30.575,59.425 30.65,59.35 C32.2@31.425,59.35
STLK_SWCLK: CN2.2 U5.A14 | length 15.1
  Top Layer w0.12: CN2.2@13.73,80.04 15.07,78.7 15.675,78.7 16.26,78.115 16.26,77.576 19.326,74.51 20.92,74.51 21.88,73.55 24.119,73.55 25.024,72.645 25.03,72.645 25.15,72.525 U5.A14@25.15,72.3
STLK_SWDIO: CN2.4 U5.A15 | length 14.2
  Top Layer w0.12: CN2.4@18.81,80.04 17.47,78.7 17.075,78.7 16.5,78.125 16.5,77.675 19.425,74.75 21.019,74.75 21.979,73.79 24.31,73.79 U5.A15@25.15,72.95
STLK_UCPD_CC1_C: C3.1 R13.2 U5.M5 | length 21.5
  Top Layer w0.12: U5.M5@32.3,66.45 32.519,66.45 32.844,66.775 33.075,66.775 33.295,66.995 33.295,67.226 33.474,67.405 35.045,67.405 35.505,66.945 36.716,66.945 38.887,69.116 v1(39.902,69.116) ; R13.2@49.425,69.3 49.425,68.525 C3.1@49.525,68.425 49.5,68.4 v1(49.5,67.575)
  Bottom Layer w0.12: v1(39.902,69.116) 42.209,69.116 44.11,67.215 49.14,67.215 v1(49.5,67.575)
STLK_UCPD_CC2_C: C20.1 R14.2 U5.N5 | length 21.8
  Top Layer w0.12: U5.N5@32.95,66.45 33.169,66.45 33.474,66.755 35.295,66.755 35.35,66.7 36.811,66.7 38.586,68.475 v1(40.125,68.475)
  Bottom Layer w0.12: v1(40.125,68.475) 42.3,68.475 43.8,66.975 50.975,66.975 51.475,67.475 C20.1@51.475,68.15 51.4,68.225 R14.2@51.4,69.025
STLK_USB_CN_N: CN1.A7 CN1.B7 U2.2 | length 6
  Top Layer w0.155: U2.2@47.15,70.1 CN1.A7@47.15,73.275 ; v2(47.9,74.325) CN1.B7@47.9,74.95
  Bottom Layer w0.155: v2(47.15,72.5) 47.9,73.25 v2(47.9,74.325) v2@47.9,74.35
STLK_USB_CN_P: CN1.A6 CN1.B6 U2.1 | length 4.9
  Top Layer w0.155: CN1.B6@47.4,74.95 47.4,74.125 47.65,73.875 CN1.A6@47.65,73.25 ; U2.1@47.65,70.15 CN1.A6@47.65,73.275
STLK_USB_N: U2.5 U5.R14 | length 16
  Top Layer w0.155: U5.R14@34.25,72.3 v1(34.775,72.3) ; v1(46.975,68.2) 47.15,68.375 U2.5@47.15,68.85
  Bottom Layer w0.155: v1(34.775,72.3) 34.855,72.3 34.989,72.435 41.616,72.435 44.581,69.469 46.665,69.469 47.209,68.925 47.209,68.438 46.975,68.204 v1(46.975,68.2)
STLK_USB_P: U2.6 U5.R15 | length 16.6
  Top Layer w0.155: U5.R15@34.25,72.95 v1(34.775,72.95) ; U2.6@47.65,68.85 47.65,68.375 v1(47.825,68.2)
  Bottom Layer w0.155: v1(34.775,72.95) 34.855,72.95 34.989,72.816 41.773,72.816 44.739,69.85 46.823,69.85 47.59,69.083 47.59,68.438 47.825,68.204 v1(47.825,68.2)
STLK_VCP_RX: R48.1 U5.C10 | length 18
  Top Layer w0.12: R48.1@16.225,61.65 v1(17.175,61.65) ; v1(20.025,70.3) 21.902,70.3 22.262,70.66 23.74,70.66 24.341,70.059 24.555,69.845 25.025,69.375 26.125,69.375 U5.C10@26.45,69.7
  Bottom Layer w0.12: v1(17.175,61.65) 17.175,66.05 20.025,68.9 v1(20.025,70.3)
STLK_VCP_TX: R49.1 U5.A7 | length 14.1
  Top Layer w0.12: R49.1@16.129,60.55 v1(17.175,60.55) ; v1(20.7,67.7) 20.705,67.695 24.32,67.695 24.375,67.75 U5.A7@25.15,67.75
  Bottom Layer w0.12: v1(17.175,60.55) 17.9,61.275 17.9,62.475 20.7,65.275 v1(20.7,67.7)
T_JTDI: CN4.10 R47.2 SB9.1 U6.4 | length 90.7
  Top Layer w0.12: CN4.10@8.602,63.395 12.645,63.395 12.985,63.735 13.435,63.735 U6.4@13.575,63.875 13.715,63.735 14.24,63.735 v1(14.75,63.225) R47.2@15.325,63.225 ; v1(18.4,37.775) 21.375,37.775 22.635,39.035 25.874,39.035 26.624,39.785 49.615,39.785 v1(49.85,39.55)
  Bottom Layer w0.12: v1(14.75,63.225) 15.535,62.44 15.535,48.751 16.67,47.616 16.67,47.182 16.907,46.945 17.578,46.945 18.64,45.883 18.64,38.008 18.407,37.775 v1(18.4,37.775) ; SB9.1@44.775,19.95 47.55,19.95 50.185,22.585 50.185,39.215 v1(49.85,39.55)
T_NRST: B2.1 B2.2 C34.2 CN4.12 CN6.3 CN7.14 R50.2 U1.5 U10.1 U13.7 | length 137.2
  Top Layer w0.12: CN7.14@5.79,35.52 CN6.3@10.87,35.52 12.67,35.52 12.925,35.775 v1(14.525,35.775) ; CN4.12@8.602,62.125 10.525,62.125 11.23,62.83 12.845,62.83 13.44,62.235 13.44,62.06 U1.5@13.575,61.925 v1(14.5,61.925) ; v1(14.675,49.625) 15.025,49.975 27.35,49.975 28.55,48.775 v1(35.9,48.775) 41.975,48.775 v1(42.475,48.275) 48.75,48.275 50.275,49.8 C34.2@50.275,51.05 49.897,51.05 49.895,51.052 U10.1@49.395,51.052 48.008,51.052 48.005,51.05 B2.2@47.23,51.05 B2.1@39.28,51.05 ; U13.7@35.75,30 35.775,30.025 35.775,37.223 36.152,37.6 v1(42.475,37.6) ; R50.2@39.375,64.975 39.4,64.95 v1(39.4,64.05)
  Bottom Layer w0.12: v1(14.5,61.925) 14.05,61.475 14.05,59 14.675,58.375 v1(14.675,49.625) 14.675,48.1 14.9,47.875 14.9,40.175 14.525,39.8 v1(14.525,35.775) ; v1(35.9,48.775) 35.9,57.514 34.608,58.805 34.608,60.8 35.425,61.617 35.425,63.475 35.995,64.045 39.395,64.045 v1(39.4,64.05) ; v1(42.475,37.6) v1(42.475,48.275)
T_PWR_EN: R8.2 R54.2 U4.4 U5.R5 U19.2 | length 49.5
  Top Layer w0.12: R54.2@11.55,73.45 11.55,77.175 11.975,77.6 v1(14.4,77.6) ; R54.2@11.8,73.195 11.84,73.155 11.845,73.155 12.275,72.725 12.275,72.425 12.4,72.3 U19.2@12.85,72.3 ; v1(18.475,77.75) 28.25,77.75 28.975,78.475 31.9,78.475 35.205,75.17 U4.4@36.867,75.17 36.867,74.82 37.107,74.58 37.215,74.58 37.677,74.118 R8.2@37.677,73.62 38.705,73.62 41.175,71.15 41.175,68.65 40.5,67.975 38.425,67.975 37.745,67.295 37.745,67.066 37.129,66.45 36.258,66.45 U5.R5@34.25,66.45
  Bottom Layer w0.12: v1(14.4,77.6) 17.782,77.6 17.932,77.75 v1(18.475,77.75)
T_PWR_EXT: R11.1 R12.1 U5.R4 | length 5.2
  Top Layer w0.2: U5.R4@34.25,65.8 R11.1@39.4,65.8
T_PWR_INT: R18.2 R51.2 U5.B13 | length 10.4
  Top Layer w0.12: R18.2@16.925,70.7 R51.2@16.925,71.675 19.761,71.675 20.111,72.025 23.6,72.025 24.3,71.325 25.475,71.325 U5.B13@25.8,71.65
T_PWR_LED: R23.2 R24.2 U5.H15 | length 41.3
  Top Layer w0.12: v1(28.5,76.2) 28.5,74.15 28.745,73.905 29.037,73.905 29.687,73.255 29.687,72.963 U5.H15@29.7,72.95 ; v1(53.575,80.325) 53.575,76.05 55.225,74.4 R24.2@55.925,74.4 57.4,74.4 R23.2@57.425,74.375
  Bottom Layer w0.12: v1(28.5,76.2) 28.5,78 30.825,80.325 31.725,81.225 52.675,81.225 v1(53.575,80.325)
T_PWR_SEL1: R20.2 U5.D10 | length 13.8
  Top Layer w0.12: R20.2@16.95,72.75 20.1,72.75 20.4,72.45 v1(21.75,72.45)
  Top Layer w0.15: U5.D10@27.1,69.7 v1(27.575,69.7)
  Bottom Layer w0.12: v1(21.75,72.45) 26.65,72.45 27.995,71.105 27.995,70.12 v1(27.575,69.7)
T_PWR_SEL2: R21.2 U5.C11 | length 16.5
  Top Layer w0.12: R21.2@16.95,73.8 v1(17.6,73.8) ; v1(17.125,69.875) 17.625,70.375 18.8,70.375 20.1,71.675 ; 21.225,71.675 20.1,71.675 ; U5.C11@26.45,70.35 26.125,70.675 24.514,70.675 23.514,71.675 20.1,71.675
  Bottom Layer w0.12: v1(17.125,69.875) 17.125,73.325 v1(17.6,73.8)
T_SWCLK: CN4.6 R44.2 SB41.1 U6.1 | length 92.4
  Top Layer w0.12: CN4.6@8.602,65.935 10.265,65.935 11.025,65.175 U6.1@11.875,65.175 12.015,65.035 12.515,65.035 12.925,64.625 14.08,64.625 14.75,65.295 v1(14.75,65.325) ; v1@14.85,65.225 14.96,65.335 15.285,65.335 R44.2@15.325,65.375 ; v1(21.45,39.275) 25.775,39.275 26.525,40.025 v1(50.425,40.025)
  Bottom Layer w0.12: v1(14.75,65.325) 16.015,64.06 16.015,61.54 16.015,48.95 16.823,48.142 18.097,48.142 18.725,47.514 18.725,46.567 19.12,46.172 19.12,39.61 19.455,39.275 v1(21.45,39.275) ; SB41.1@44.775,18.55 46.575,18.55 50.425,22.4 v1(50.425,40.025)
T_SWDIO: CN4.4 R45.2 SB40.1 U6.5 | length 58.8
  Top Layer w0.12: CN4.4@8.602,67.205 11.12,67.205 13.01,65.315 13.435,65.315 U6.5@13.575,65.175 13.575,65.8 14.225,66.45 R45.2@15.325,66.45
  Bottom Layer w0.12: v1(14.75,66.45) 14.345,66.045 14.345,65.77 14.345,65.08 14.625,64.8 14.925,64.8 15.775,63.95 15.775,48.851 16.723,47.902 17.4,47.902 17.9,47.403 17.895,47.398 17.895,47.057 18.88,46.072 18.88,23.72 21.55,21.05 SB40.1@21.55,19.825
T_SWO: CN4.8 R46.2 SB15.2 U6.3 | length 88.7
  Top Layer w0.12: CN4.8@8.602,64.665 8.674,64.593 10.107,64.593 10.825,63.875 U6.3@11.875,63.875 12.015,64.015 12.515,64.015 12.8,64.3 R46.2@15.325,64.3 ; v1(18.425,37.125) 24.75,37.125 25.325,37.7 27.17,39.545 48.955,39.545 v1(49.725,38.775)
  Bottom Layer w0.12: v1(14.75,64.3) 14.345,63.895 14.345,62.992 15.295,62.042 15.295,48.652 16.43,47.517 16.43,46.947 18.4,44.977 18.4,38.725 17.978,38.303 17.978,37.572 v1(18.425,37.125) ; SB15.2@44.875,24.1 49.3,24.1 49.945,24.745 49.945,38.555 v1(49.725,38.775)
T_VCC_AIN: R16.1 R19.1 U5.N3 | length 4.2
  Top Layer w0.15: U5.N3@32.95,65.15 33.275,64.825 34.8,64.825 35.175,64.45 R16.1@35.775,64.45
  Top Layer w0.3: R19.1@35.775,63.4 R16.1@35.775,64.45
T_VCP_RX: CN4.13 R49.2 SB2.2 SB23.1 U1.3 | length 84.3
  Top Layer w0.12: CN4.13@4.538,60.855 5.563,60.855 6.318,60.1 10.625,60.1 11.15,60.625 U1.3@11.875,60.625 11.775,60.525 11.6,60.525 v1(11.6,59.725) 14.175,59.725 14.96,60.51 15.26,60.51 R49.2@15.325,60.575 ; v1(13.075,33.95) v1(20.925,33.95)
  Bottom Layer w0.12: v1(11.6,59.725) 11.6,58.101 14.195,55.506 14.195,50.132 13.25,49.187 13.25,34.475 13.075,34.3 v1(13.075,33.95) ; v1(19.4,33.95) 19.825,33.525 19.825,24.7 24.395,20.13 24.395,11.444 24.819,11.02 26.016,11.02 27.171,9.865 31.715,9.865 32.285,10.435 SB23.1@32.285,12.165 ; v1(20.925,33.95) 20.935,33.94 SB2.2@21.91,33.94
T_VCP_TX: CN4.14 R48.2 SB1.2 SB3.2 SB20.1 U1.1 | length 89.1
  Top Layer w0.12: CN4.14@8.602,60.855 8.89,61.143 10.093,61.143 10.875,61.925 U1.1@11.875,61.925 ; v1@12.175,62.5 12.175,62.065 12.035,61.925 U1.1@11.875,61.925 ; v1(13.75,28.95) 13.755,28.945 20.57,28.945 20.575,28.94 v1(20.575,28.925) v1(21.9,28.925) ; R48.2@15.325,61.65 15.15,61.475 12.825,61.475 12.515,61.785 12.015,61.785 U1.1@11.875,61.925
  Bottom Layer w0.12: v1(12.175,62.425) 12.175,57.865 14.435,55.605 14.435,50.032 13.49,49.087 13.49,35.246 13.75,34.986 v1(13.75,28.95) ; v1@12.238,62.423 v1@12.24,62.425 ; v1(21.9,28.925) 21.91,28.935 SB3.2@21.91,29.815 ; SB1.2@21.9,36.7 20.95,36.7 20.175,35.925 20.175,31.725 20.575,31.325 v1(20.575,28.925) 20.575,24.386 24.635,20.326 24.635,11.544 24.919,11.26 26.115,11.26 27.27,10.105 30.355,10.105 30.91,10.66 SB20.1@30.91,12.165
USB_Disconnect: R34.1 SB43.1 | length 34.9
  Top Layer w0.12: R34.1@18.375,14.15 18.388,14.163 18.388,16.288 21.09,18.99 26.315,18.99 26.505,18.8 v1(26.55,18.8)
  Bottom Layer w0.12: v1(26.55,18.8) 26.55,17.375 27.45,16.475 32.325,16.475 34.775,18.925 35.9,18.925 39.4,22.425 44.475,22.425 44.775,22.125 SB43.1@44.775,21.325
USB_FS_N: CN3.A7 CN3.B7 SB13.1 U17.1 U17.6 | length 35.6
  Top Layer w0.155: CN3.B7@22,7.56 v2(22,8.25) ; CN3.A7@22.75,9.36 v2@22.75,10.125 ; v2(22.75,10.175) 22.75,11.45 23.45,12.15 U17.6@23.45,13.075 U17.1@23.45,15.375 ; U17.1@23.325,15.375 23.325,15.8 23.228,15.898 22.717,16.408 22.717,16.536 23,16.819 23.756,16.819 24.8,15.775 24.8,13.211 27.874,10.137 32.261,10.137 32.598,9.8 38.175,9.8 38.369,9.606 38.369,9.431 v1(38.094,9.156)
  Bottom Layer w0.155: v2(22,8.25) 22,9.425 v2(22.75,10.175) ; SB13.1@36.55,12.175 36.55,11.975 37.094,11.431 37.094,10.442 37.461,10.075 37.997,10.075 38.369,9.703 38.369,9.528 38.369,9.4 38.125,9.156 v1(38.094,9.156)
USB_FS_P: CN3.A6 CN3.B6 R34.2 SB17.1 U17.3 U17.4 | length 40.6
  Top Layer w0.155: v1(18.375,12.05) R34.2@18.375,12.775 ; v1(20.65,12.85) 20.7,12.85 20.703,12.853 U17.4@21.55,12.853 ; CN3.A6@22.25,9.36 22.25,11.525 21.55,12.225 U17.4@21.55,12.853 ; CN3.A6@22.275,9.2 22.275,8.675 22.5,8.45 CN3.B6@22.5,7.56 ; v1(39.025,9.156) 38.75,9.431 38.75,9.764 38.333,10.181 32.756,10.181 32.419,10.518 28.032,10.518 25.181,13.369 25.181,15.933 23.914,17.2 22.843,17.2 22.325,16.682 22.325,16.45 21.773,15.898 21.55,15.675 U17.4@21.55,13.075 ; U17.4@21.55,12.853 21.772,12.853 U17.4@21.55,13.075 ; U17.4@21.55,12.853 U17.4@21.55,13.075
  Bottom Layer w0.155: v1(18.375,12.05) 19.175,12.85 v1(20.65,12.85) ; SB17.1@37.976,12.161 37.976,11.961 37.475,11.46 37.475,10.6 37.619,10.456 38.155,10.456 38.75,9.861 38.75,9.686 38.75,9.4 38.994,9.156 v1(39.025,9.156)
VBAT: C53.2 CN7.33 SB38.2 U13.1 | length 77.9
  Top Layer w0.3: CN7.33@3.25,10.12 1.75,8.62 1.75,4.5 1.975,4.275 2.212,4.275 2.722,3.765 16.59,3.765 17.05,4.225 17.05,9.275 19.75,11.975 19.75,16.075 21.725,18.05 24.825,18.05 25.575,17.3 v1(27.775,17.3) ; U13.1@38.75,30 38.75,31.16 39.665,32.075 41.4,32.075 41.83,32.505 41.955,32.505 C53.2@42.125,32.675 ; C53.2@42.125,32.8 C53.2@42.125,32.675 ; v1(44.3,31.45) 43.475,31.45 42.42,32.505 42.295,32.505 C53.2@42.125,32.675
  Bottom Layer w0.3: v1(27.775,17.3) 31.925,17.3 34.425,19.8 35.65,19.8 39.825,23.975 40.7,23.975 44.3,27.575 v1(44.3,31.45) 43.325,31.45 43.2,31.325
VBUS_DET: R37.1 R40.2 SB42.1 | length 5.8
  Top Layer w0.3: R37.1@23.25,23.05 v1(24.2,23.05) R40.2@25.2,23.05
  Bottom Layer w0.3: SB42.1@22.01,25 22.01,24.215 22.225,24 23.9,24 24.049,23.851 24.2,23.7 v1(24.2,23.05)
VBUS_STLK: C2.1 C11.2 C29.2 CN1.A4 CN1.A9 CN1.B4 CN1.B9 CN10.8 D1.1 JP5.7 R1.2 R6.2 U3.1 U4.5 U19.3 U19.4 | length 43.8
  Top Layer w0.3: R6.2@35.327,76.595 35.422,76.595 35.527,76.49 35.527,76.426 35.703,76.25 37.936,76.25 38.516,75.67 38.617,75.67 38.767,75.52 U4.5@38.767,75.17 ; R1.2@39.1,80.55 v1(39.8,80.55) ; v1(46.15,71.575) 46.15,72.962 CN1.A9@46.15,73.25 ; v2(46.15,74.25) 46.4,74.5 CN1.B4@46.4,74.95 ; v1@48.65,72.475 CN1.A4@48.65,73.225 ; v2(48.9,74.25) CN1.B9@48.9,74.95 ; v1(52.075,72.05) C2.1@52.825,72.05 U3.1@54.025,72.05
  Signal Layer 2 w1: v1(11.1,71.425) 12.5,72.825 18.6,72.825 24.175,78.4 29.175,78.4 31.325,80.55 v1(39.8,80.55) v1@40.25,80.55
  other v1: 50.87,63.075 49.815,63.675 51.925,63.675 50.87,64.275 48.65,72.525 41.2,74.4 41.2,75.05 40.425,80.55
VBUSC: D3.1 JP5.9 SB45.2 | length 1.9
  Bottom Layer w1: JP5.9@59.125,68.025 60.975,68.025
VCAP: C47.2 C48.2 U13.30 U13.62 | length 22.1
  Top Layer w0.3: C48.2@26.61,21.365 26.625,21.35 v1(27.3,21.35) U13.30@29.1,21.35 30.315,21.35 30.996,20.668 30.996,20.379 v1(31.025,20.35) ; U13.62@40.9,26.85 v1(42.725,26.85) 43.255,26.85 43.425,27.02 C47.2@43.425,27.125
  Bottom Layer w0.3: v1(31.025,20.35) 32.775,20.35 39.275,26.85 v1(42.725,26.85)
VDD: B1.1 B1.2 CN7.5 JP2.1 JP6.2 | length 24.9
  Top Layer w0.3: B1.1@22.77,51.05 v1(23.9,51.05) B1.2@30.72,51.05
  Bottom Layer w0.3: v1(23.9,51.05) 28.725,51.05 30.95,48.825 30.95,44.475 JP2.1@34.2,41.225
VDD_MCU: C42.2 C45.2 C52.2 C54.2 C55.2 JP2.2 R33.1 SB38.1 U13.19 U13.32 U13.48 U13.64 | length 16.1
  Top Layer w0.3: v1(25.675,26.15) 25.675,26.825 C55.2@25.66,26.84 C54.2@26.76,26.84 26.77,26.85 U13.19@29.1,26.85 ; C45.2@26.9,20.225 v1@27.264,20.225 ; v1(27.264,20.436) v1@27.264,20.225 ; U13.32@29.1,20.35 28.4,20.35 28.275,20.225 27.475,20.225 v1@27.264,20.225 ; v1(29.15,35.975) 29.18,35.975 29.516,35.639 29.665,35.49 29.835,35.32 R33.1@29.835,35.14 ; U13.48@38.75,18.2 38.75,16.675 39.745,15.68 39.77,15.68 39.875,15.575 C42.2@39.875,15.55 39.875,14.86 v1(39.885,14.85) ; U13.64@40.9,27.85 42.35,27.85 v1(42.75,28.25) C52.2@43.35,28.25
  Bottom Layer w0.3: v1(42.75,28.25) 43.2,28.7 SB38.1@43.2,29.925
VIN: C41.2 CN6.8 CN7.24 U11.3
  other v1: 17.65,38.825 17.65,39.45